# EAGLE board breakout-lrtb-g6tg_full (EAGLE 6.5.0)
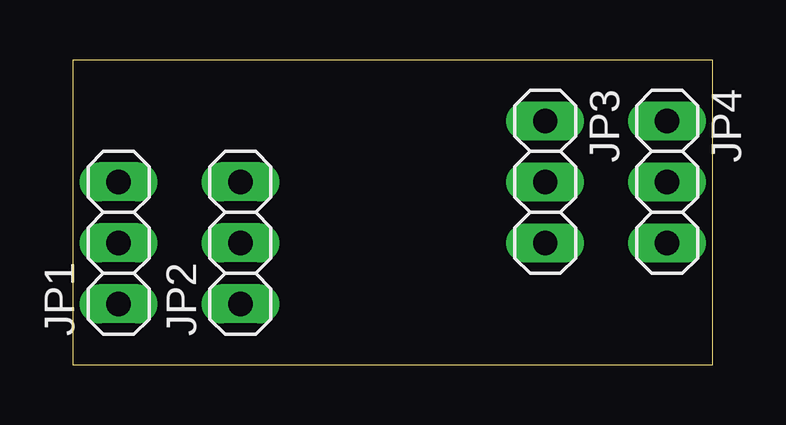
[diagram p0: board, top side]
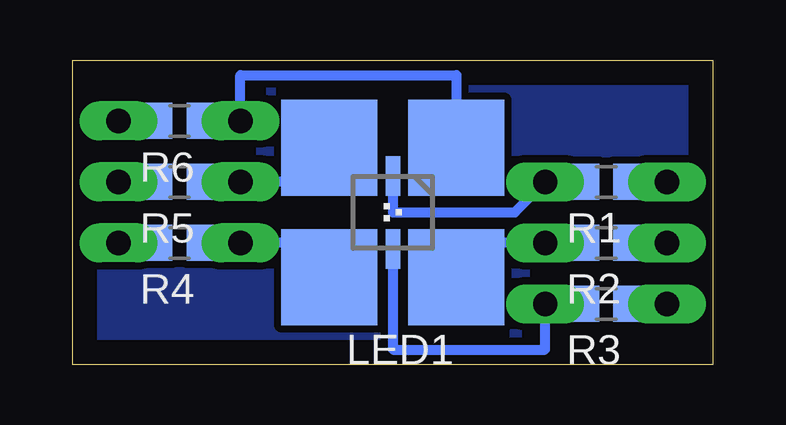
[diagram p1: board, bottom side, seen from below]

Size 26.67 x 12.7 mm. Coordinates in mm from the lower left corner, seen from the top.
Outline: 0,0 26.67,0 26.67,12.7 0,12.7 0,0
Copper layers (1*16): Top 0.035mm / dielectric 1.5mm / Bottom 0.035mm
Design rules "default *": minimum track width 16mil, minimum drill 24mil, track to track 12mil, track to pad 12mil, pad to pad 12mil, via to via 12mil, smd to smd 8mil, copper to edge 40mil, drill to drill 8mil, minimum pad ring 12mil, minimum via ring 12mil, stop-mask expansion 4mil, vias tented up to drill 0mil, thermal gap 10mil
bRestrict: area 14,5.7 to 25.4,7; area 12.7,8.9 to 14,11.4; area 19.1,8.3 to 25.4,9.5; area 1.3,5.7 to 7.6,7; area 1.3,3.2 to 7.6,4.4; area 0.6,1.3 to 6.3,1.9; area 20.3,11.4 to 26,12.1

## Footprints (pad centres in the part's own frame; a part is rotated, then mirrored left to right if it is on the bottom)
1X03 = drill 1.016 long: 1 -2.54,0; 2 0,0; 3 2.54,0
LRTB_G6SG = smd 4 x 4: 1 -2.65,-2.7; 3 2.65,-2.7; 4 2.65,2.7; 6 -2.65,2.7 | smd 0.6 x 1.65: 2 0,-1.525; 5 0,1.525
R0805 = smd 1.3 x 1.5: 1 -0.95,0; 2 0.95,0

## Placement (x,y rotation side)
JP1  [1X03]  1.91,5.08 90 top
JP2  [1X03]  6.99,5.08 90 top
JP3  [1X03]  19.68,7.62 270 top
JP4  [1X03]  24.77,7.62 270 top
LED1  LRTB_G6SG  [LRTB_G6SG]  13.34,6.35 180 bottom
R1  [R0805]  4.45,7.62 180 bottom
R2  [R0805]  4.45,5.08 180 bottom
R3  [R0805]  4.45,2.54 180 bottom
R4  [R0805]  22.23,5.08 180 bottom
R5  [R0805]  22.23,7.62 180 bottom
R6  [R0805]  22.23,10.16 180 bottom

## Library data of the parts
JP1-JP4 = pinhead
LED1 = led
R1-R6 = rcl

## Nets
N$1: JP4.3 R4.2
N$2: JP4.2 R5.2
N$3: JP4.1 R6.2
N$4: JP3.2 LED1.3 R5.1
N$5: JP3.3 LED1.4 R4.1
N$6: JP3.1 LED1.1 R6.1
N$7: JP2.2 LED1.6 R2.2
N$8: JP2.1 LED1.5 R3.2
N$9: JP2.3 LED1.2 R1.2
N$10: JP1.2 R2.1
N$11: JP1.1 R3.1
N$12: JP1.3 R1.1

## Tracks (layer width: path | path; a pad name or v marks a point on that pad's centre or on a via)
N$1
  Bottom 0.61: R4.2 JP4.3
N$2
  Bottom 0.61: R5.2 JP4.2
N$3
  Bottom 0.61: R6.2 JP4.1
N$4
  Bottom 0.406: LED1.3 15.98,7.62 JP3.2
  Bottom 0.61: R5.1 JP3.2
N$5
  Bottom 0.406: LED1.4 15.98,5.08 JP3.3
  Bottom 0.61: R4.1 JP3.3
N$6
  Bottom 0.406: JP3.1 19.68,12.06 10.69,12.06 LED1.1
  Bottom 0.61: R6.1 JP3.1
N$7
  Bottom 0.406: JP2.2 10.69,5.08 LED1.6
  Bottom 0.61: R2.2 JP2.2
N$8
  Bottom 0.406: LED1.5 13.34,0.64 6.99,0.64 JP2.1
  Bottom 0.61: R3.2 JP2.1
N$9
  Bottom 0.406: LED1.2 13.34,6.35 8.26,6.35 JP2.3
  Bottom 0.61: R1.2 JP2.3
N$10
  Bottom 0.61: R2.1 JP1.2
N$11
  Bottom 0.61: R3.1 JP1.1
N$12
  Bottom 0.61: R1.1 JP1.3
N$13
  pour Bottom: 26.67,12.7 26.67,0 0,0 0,12.7